# Altium PCB PCB.PcbDoc (part 3 of 3)
Units mil, origin at the board's own origin, x right, y up, seen from the top; angles counter-clockwise.
Board outline 3915 x 3280 mil, 4 copper layers (Top Layer, Top GND, Bottom GND, Bottom Layer), stack 61.581 mil thick; 92 components, 110 nets, 515 pads, 133 vias.
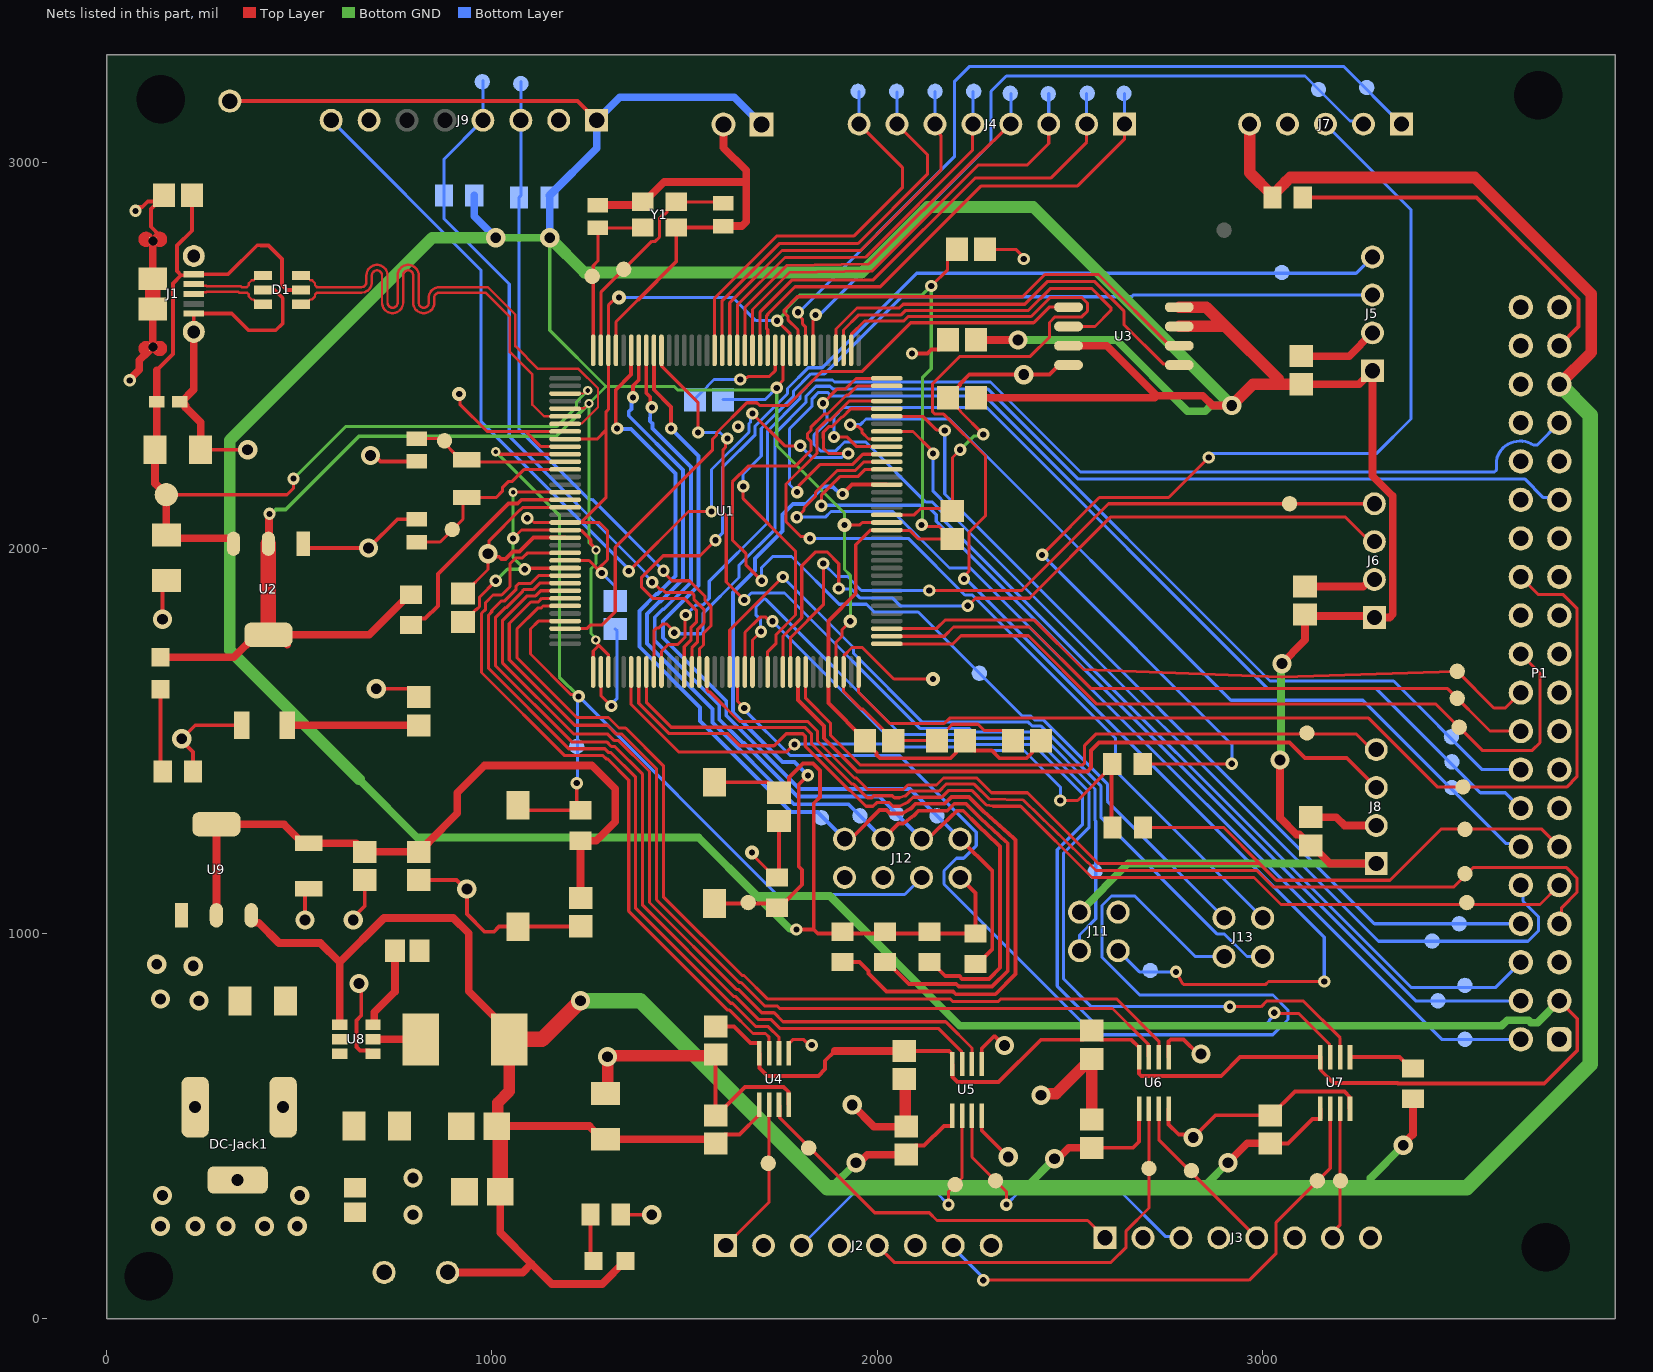
[diagram p4: the nets of this part, all layers, seen from the top]

## Via types
v1: diameter 32, hole 16, Top Layer to Bottom Layer, 77 vias
v2: diameter 50, hole 28, Top Layer to Bottom Layer, 44 vias
v3: diameter 36, hole 16, Top Layer to Bottom Layer, 6 vias
v4: diameter 24, hole 12, Top Layer to Bottom Layer, 6 vias

## Nets (pads, with @x,y where several pads share a name; then routed paths per layer and width w, separated by ;. In a path a pad name is that pad's centre, name@x,y a point inside that pad or via, vN(x,y) a via of type N, cw(c..) or ccw(c..) an arc to the next point about the centre after c; other vN are vias at no path point)
+3V3: C1.1 C7.1 C8.1 C9.1 C10.1 C11.1 C13.1 C14.1 C15.1 C17.1 C22.1 C26.1 C31.1 C32.1 C33.1 C34.1 C37.1 DS2.1 J5.1 J6.1 J8.1 J9.1 J10.1 J11.02 J12.02 P1.3 R2.2 R4.2 R5.2 R6.2 R7.2 R8.2 R9.2 R12.2 SW1.2 TP1.TP U1.11 U1.41 U1.52 U1.57 U1.62 U1.73 U1.75 U1.105 U1.125 U2.2 U2.4 U3.3 U3.7 U3.8 U4.8 U5.8 U6.8 U7.8 U9.2 U9.4 | length 27083.5
  Top Layer w6: U1.41@1190,2361.54 1227.01,2361.54 1228.12,2362.65 1239.35,2362.65 v4(1252.07,2375)
  Top Layer w8: C17.1@925,1808.55 927,1808.55 959.26,1840.81 960.6,1840.81 967.63,1847.84 967.63,1872.63 v1(1010,1915) ; v1(1055,2025) 1076.57,2046.57 U1.57@1190,2046.57 1190.73,2045.85 1231.8,2045.85 1256.52,2021.12 1256.52,2010.94 1270,1997.46 v4(1270,1995) ; v4(1055,2145) U1.52@1190,2145 ; v1(1085,1945) 1087.42,1947.42 1189.27,1947.42 U1.62@1190,1948.15 ; U1.73@1262.83,1678.46 1262.83,1732.83 1276.69,1746.69 1278.31,1746.69 ; v4(1269.37,1761.37) 1269.37,1757.04 1273.62,1752.78 1273.62,1751.38 1278.31,1746.69 ; U1.75@1302.2,1678.46 1301.99,1678.68 1301.99,1723.01 1278.31,1746.69 ; v1(1739.13,2415.62) 1739.13,2419.04 1754.96,2434.87 U1.11@1754.96,2513.11 ; U1.105@1892.76,1678.46 1892.76,1755.18 1908.31,1770.73 1908.31,1788.31 v3(1930,1810) ; v3(1915,2060) 1954.93,2060 1961.19,2066.26 U1.125@2024.65,2066.26
  Top Layer w10: TP1.TP@320,3160 1221.85,3160 J9.1@1271.85,3110 ; U2.2@420,2011.22 U2.2@421.46,2012.68 ; v1@421.46,2087.27 v1(422.92,2088.72) ; SW1.2@1577.68,1392.36 1715.64,1392.36 1743,1365 C9.1@1745,1365 1747,1365 1770.63,1388.63 1770.63,1404.47 1807.16,1441 1832.84,1441 1851,1422.84 1851,1353.82 1835,1337.82 1835,1010 ; C1.1@1580.46,758.08 1628.14,758.08 1670.87,715.35 1692.91,715.35 1693.82,714.45 U4.8@1693.82,688.86 1694.72,687.95 1694.72,650.28 1715,630 1847.2,630 1864.78,647.57 1864.78,669.31 1890,694.54 ; v1(1790,1010) 1835,1010 ; C34.1@2070,694.96 2185.96,694.96 2194.41,686.51 U5.8@2194.41,660.92 2195.32,660.01 2195.32,626.99 2207.88,614.42 2314.78,614.42 2424.14,723.78 2533.03,723.78 C14.1@2556.67,747.42 2580.3,723.78 2660.07,723.78 2679.41,704.45 U6.8@2679.41,678.86 2679.41,635.59 2685.27,629.73 2892.62,629.73 2941.74,678.86 U7.8@3150,678.86 3150.91,677.95 3150.91,644.93 3184.34,611.5 3349.74,611.5 3350.49,610.75 3730.73,610.75 3816.5,696.52 3816.5,778.5 P1.3@3770,825 ; J12.02@2215,1145 2255,1105 R7.2@2255,999.37 1845.63,999.37 1835,1010
  Top Layer w20: DS2.1@140,1716.34 330.32,1716.34 388.98,1775 U2.4@420,1775 ; U9.2@285,1046.89 U9.4@285,1283.11 460.2,1283.11 509.25,1234.06 C37.1@525,1234.06 647.39,1234.06 C7.1@670,1211.45 C31.1@810,1211.45 812,1211.45 835.63,1235.08 835.63,1237.08 910,1311.45 910,1365 980.86,1435.86 1259.14,1435.86 1320,1375 1320,1290 1270.63,1240.63 R12.2@1230,1240.63 C32.1@1230,1091.45 ; U2.2@421.46,2012.68 v1@421.46,2087.27 ; C15.1@469.06,1540 C8.1@810,1540 ; U2.4@469.06,1749.36 443.42,1775 681.34,1775 785.08,1878.74 R2.2@790,1878.74 ; 1890.02,694.98 C34.1@2070,694.96 ; C11.1@2256.45,2390 2720,2390 2725,2395 ; C10.1@2256.45,2540 v2(2365,2540) ; U3.3@2496.3,2525 2595,2525 2725,2395 ; v2(2920,2370) 2870,2370 2845,2395 2725,2395 ; v2(3045,1450) 3045,1299.55 3087.74,1256.81 3094.74,1256.81 3123,1228.55 C33.1@3125,1228.55 3127,1228.55 3173.98,1181.57 J8.1@3295,1181.57 ; v2(3050,1700) 3103.82,1755.74 3110,1761.92 C13.1@3110,1827.1 3113.69,1823.41 3286.31,1823.41 J6.1@3290,1819.72 3329.48,1819.72 3337.69,1827.93 3337.69,2134.75 3285,2187.44 J5.1@3285,2460 3250,2425 C26.1@3100,2425
  Top Layer w30: U3.7@2783.7,2575 2900,2575 2902.05,2577.05 ; U3.8@2783.7,2625 2854.1,2625 2902.05,2577.05 ; v2(2920,2370) 2975,2425 C26.1@3100,2425 ; 3040.47,2438.63 2902.05,2577.05
  Top Layer w40: U2.4@420,1775 U2.2@420,2011.22
  Bottom GND w8: v1(1010,1915) 1040,1945 v1(1085,1945) 1055,1975 v1(1055,2025) v4(1055,2145) ; v2(1150,2805) 1150,2565.07 1296.07,2419 ; v4(1269.37,1761.37) 1269.37,1765.7 1257,1778.06 1257,1946.6 1270,1959.6 v4(1270,1995) 1252.07,2012.93 v4(1252.07,2375) 1296.07,2419 ; v3(1930,1810) 1930,1929.18 1915,1944.18 v3(1915,2060) 1915,2090 1739.13,2265.87 v1(1739.13,2415.62) 1732.64,2415.62 1726.57,2409.55 1482.95,2409.55 1473.51,2419 1296.07,2419
  Bottom GND w10: v1(422.92,2088.72) 428.72,2088.72 440,2100 465,2100 655,2290 1167.07,2290 v4(1252.07,2375)
  Bottom GND w20: 655,1400 806.46,1248.54 1536.46,1248.54 1687.92,1097.08 ; v2(1010,2805) v2(1150,2805) ; v1(1790,1010) 1787.7,1012.3 1772.7,1012.3 1687.92,1097.08 ; v2(2365,2540) 2620,2540 2805,2355 2850.94,2355 2865.94,2370 v2(2920,2370) ; J11.02@2525,1055 2651.57,1181.57 J8.1@3295,1181.57 ; v2(3045,1450) 3047.5,1452.5 3047.5,1697.5 v2(3050,1700) ; P1.3@3770,825 3713.28,768.28 3696.71,768.28 3690.5,774.5 3634.5,774.5 3620,760 2214.39,760 1877.31,1097.08 1687.92,1097.08
  Bottom GND w30: 655,1400 320,1735 320,2280 845,2805 v2(1010,2805) ; v2(1150,2805) 1240,2715 1960,2715 2130,2885 2405,2885 v2(2920,2370)
  Bottom Layer w8: C22.1@1600,2385 1708.51,2385 v1(1739.13,2415.62)
  Bottom Layer w10: R8.2@1149.37,2914.92 R8.2@1150,2914.29
  Bottom Layer w20: R9.2@954.37,2915 954.37,2860.63 v2(1010,2805) ; R8.2@1149.37,2914.92 1271.85,3037.4 J9.1@1271.85,3110 1331.85,3170 1628.54,3170 J10.1@1699.21,3099.33 ; v2(1150,2805) R8.2@1150,2914.29
+5: C27.1 C28.1 C29.1 C30.1 C38.1 C39.1 C42.1 DS1.1 J7.5 L1.2 P1.35 R1.2 R3.1 TP3.TP U4.1 U5.1 U6.1 U7.1 U8.1 U9.3 | length 10994.1
  Top Layer w10: C28.1@1568.76,465.91 C28.1@1580.46,454.22 1604.09,477.85 1642.26,477.85 1693.82,529.41 U4.1@1693.82,555 ; C27.1@2075,425.61 2098.63,449.25 2121.41,449.25 2172.73,500.57 2193.5,500.57 2194.41,501.47 U5.1@2194.41,527.06 ; C29.1@2556.67,443.55 2663.55,443.55 2679.41,459.41 U6.1@2679.41,545 ; C30.1@3020,455 3065.59,455 3129.09,518.5 3149.09,518.5 3150,519.41 U7.1@3150,545
  Top Layer w20: U9.3@375.55,1046.89 375.55,1039.3 386.93,1027.92 394.52,1027.92 447.44,975 555,975 605,925 ; U8.1@605,762.4 605,925 ; TP3.TP@885,120 1080,120 1102.5,142.5 ; C39.1@1021.3,330 1021.3,223.7 1102.5,142.5 ; C38.1@1021.3,500 1253.01,500 1287.1,465.91 C42.1@1295,465.91 C28.1@1568.76,465.91 ; L1.2@1045,725 1045,745 940,850 940,1000 900,1040 720,1040 605,925 ; DS1.1@1346.34,150 1286.34,90 1155,90 1102.5,142.5 ; v2(1945,405) 1953.12,405 1973.73,425.61 C27.1@2075,425.61 ; v2(2460,415) 2468.12,415 2496.67,443.55 C29.1@2556.67,443.55 ; v2(2910,405) 2960,455 C30.1@3020,455 ; v2(3365,450) 3365,453.25 3390,478.25 R3.1@3390,570.63
  Top Layer w30: C38.1@1021.3,500 1015,506.3 1015,560 1045,590 L1.2@1045,725 ; J7.5@2966.3,3100 2966.3,2974.25 3025.63,2914.92 3057.75,2947.04 3057.75,2948.07 3071.22,2961.54 3550.12,2961.54 3852.5,2659.17 3852.5,2507.5 P1.35@3770,2425
  Top Layer w40: C39.1@1021.3,330 C38.1@1021.3,491.3 ; L1.2@1045,725 1130,725 v2(1230,825)
  Bottom GND w20: 1870,340 1880,340 v2(1945,405) ; 2380,340 2385,340 v2(2460,415) ; 2854.72,340 2854.72,349.72 v2(2910,405) ; 3280,340 3280,365 v2(3365,450)
  Bottom GND w40: v2(1230,825) 1385,825 1870,340 ; 1880,340 2380,340 ; 2385,340 2854.72,340 3280,340 3530,340 3850,660 3850,2345 P1.35@3770,2425
+12: C35.1 C36.1 C41.1 DC-Jack1.1 U8.2 U8.3
+VDDOUT: C2.1 C12.1 C18.1 C19.1 C20.1 C21.1 U1.10 U1.34 U1.45 U1.56 U1.61 U1.104 U1.124 | length 4485.7
  Top Layer w8: v1(1091.62,2077.2) 1098.11,2077.2 1109.05,2066.26 U1.56@1190,2066.26 1231.8,2066.26 1278.74,2066.26 1300,2045 1300,1970 v1@1275,1945 ; U1.61@1190,1967.83 1252.17,1967.83 v1@1275,1945 ; U1.45@1190.22,2282.57 1272.57,2282.57 1296.56,2306.56 ; 1231.8,2066.99 1296.56,2131.75 1296.56,2306.56 ; v1(1285,1935) v1@1275,1945 ; v3(1330,2650) 1322.49,2650 1302.2,2629.71 U1.34@1302.2,2513.11 1302.2,2359.61 1296.56,2353.97 1296.56,2306.56 ; v1(1740,2590) 1773.92,2556.08 1773.92,2513.84 U1.10@1774.65,2513.11 ; U1.124@2024.65,2046.57 2025.37,2045.85 2084.15,2045.85 2106.45,2023.55 C12.1@2193,2023.55 ; v1(2115,2060) 2119.19,2055.81 2160.74,2055.81 C12.1@2193,2023.55 ; v1(2140,2680) 2182.47,2722.47 2182.47,2750.37 C2.1@2207.1,2775 ; C12.1@2195,2023.55 C12.1@2193,2023.55
  Top Layer w10: U1.124@2024.65,2046.57 2024.3,2046.23 1981.81,2046.23 1943.98,2008.4 1943.98,1881.98 1873.07,1811.07 U1.104@1873.07,1678.46 1873.07,1597.48 1968.55,1502 C18.1@1968.55,1500 1968.55,1498 1997.81,1468.74 1997.81,1463.15 2006.6,1454.37 2189.85,1454.37 2204.26,1468.78 2204.26,1476.37 C19.1@2227.9,1500 2227.9,1498 2251.53,1474.37 2297.26,1474.37 2317.26,1454.37 2386.95,1454.37 2401.37,1468.78 2401.37,1476.37 C20.1@2425,1500
  Bottom GND w8: v1(1740,2590) 1763.56,2613.56 1763.56,2620.69 1799.72,2656.85 2116.85,2656.85 v1(2140,2680) 2140,2464.95 2117,2441.95 2117,2062 v1(2115,2060)
  Bottom Layer w8: v1(1285,1935) 1320,1900 C21.1@1320,1862.9 ; v3(1330,2650) 1625,2650 1685,2590 v1(1740,2590)
BCLK_TK: J7.2 pad.1@3145,3190 U1.7 | length 1903.7
  Top Layer w8: U1.7@1833.7,2513.11 1833.7,2592.21 1840,2598.51 v1(1840,2605)
  Bottom Layer w8: v1(1840,2605) 1844.59,2609.59 1854.59,2609.59 2295,3050 2295,3185 2335,3225 3110,3225 3226.81,3108.19 3253.39,3108.19 J7.2@3261.57,3100
CS: P1.29 U1.81 | length 3066.7
  Top Layer w8: U1.81@1420.32,1678.46 1420.32,1785.32 1427.87,1792.87 1433.53,1792.87 1444,1803.34 1453.09,1803.34 1473,1783.43 v1(1473,1780)
  Bottom Layer w8: v1(1473,1780) 1475.52,1777.48 1542.8,1777.48 1547.48,1782.17 1547.48,1829.85 1641.24,1923.61 1641.24,1955.28 1735,2049.04 1735,2297.88 1815.09,2377.97 1815.09,2394.14 1840.86,2419.91 1877.31,2419.91 1884.23,2413 2286.54,2413 2520.04,2179.5 3679.84,2179.5 3728.5,2130.84 3764.16,2130.84 P1.29@3770,2125
DB0: P1.2 pad.1@3525,725 U1.133 | length 2754.9
  Top Layer w8: v1(1791.28,2080) 1809.68,2098.4 1809.68,2104.31 1839.57,2134.2 1839.57,2144.63 1896.15,2201.2 1943.02,2201.2 1965.56,2223.74 U1.133@2024.65,2223.74
  Bottom Layer w8: v1(1791.28,2080) 1865,2080 1880,2095 2040.4,2095 2187.4,1948 2241.6,1948 3464.6,725 P1.2@3670,725
DB1: P1.4 pad.1@3455,825 U1.132 | length 2582.9
  Top Layer w8: v1(1855,2110) 1855.57,2110.57 1855.57,2138 1902.77,2185.2 1949.65,2185.2 1968.51,2204.06 U1.132@2024.65,2204.06
  Bottom Layer w8: v1(1855,2110) 1856,2111 2111.37,2111 2119.37,2103 2136.6,2103 2153,2086.6 2153,2069.37 3397.37,825 P1.4@3670,825
DB2: P1.6 pad.1@3525,865 U1.144 | length 2791.7
  Top Layer w8: v1(1859.09,2375.91) 1896.4,2413.22 1918.22,2413.22 1944.77,2439.77 1967.51,2439.77 1968.02,2440.28 U1.144@2024.65,2440.28
  Bottom Layer w8: v1(1859.09,2375.91) 1862.8,2372.2 1862.8,2351.11 1870,2343.91 1870,2327.43 1836.29,2293.71 1836.29,2268.86 1853.86,2251.29 1891.29,2251.29 1915,2275 1970,2275 2126,2119 2143.23,2119 2169,2093.23 2169,2076 3385,860 3605,860 P1.6@3670,925
DB3: P1.8 pad.1@3510,1025 U1.139 | length 2287.5
  Top Layer w8: U1.139@2024.65,2341.85 2118.15,2341.85 2153.2,2306.8 2173.2,2306.8 v1(2175,2305)
  Bottom Layer w8: v1(2175,2305) 2175,2140 3290,1025 P1.8@3670,1025
DB4: P1.10 pad.1@3440,980 U1.137 | length 2454.9
  Top Layer w8: U1.137@2024.65,2302.48 2092.52,2302.48 2145,2250 v1(2145,2245)
  Bottom Layer w8: v1(2145,2245) 2145,2147.37 2185,2107.37 2185,2095 3300.5,979.5 3688.85,979.5 3715.5,1006.15 3715.5,1043.85 3675.84,1083.5 3675.84,1119.16 P1.10@3670,1125
DB5: P1.12 pad.1@3491.23,1378.6 U1.136 | length 2319.8
  Top Layer w8: v1(1930,2320) 1934.59,2315.41 1950.94,2315.41 1960.8,2305.55 1960.8,2299.2 1977.2,2282.8 U1.136@2024.65,2282.8
  Bottom Layer w8: v1(1930,2320) 1955.65,2320 1970.65,2335 2187.43,2335 2917.43,1605 3260,1605 3632.24,1232.76 3662.24,1232.76 P1.12@3670,1225
DB6: P1.14 pad.1@3491.23,1445.1 U1.135 | length 2422.9
  Top Layer w8: v1(1887.83,2288.18) 1888.31,2288.66 1920.94,2288.66 1946.49,2263.11 U1.135@2024.65,2263.11
  Bottom Layer w8: v1(1887.83,2288.18) 1888,2288.36 1888,2340.43 1912.57,2365 2283.63,2365 3013.63,1635 3295,1635 3565,1365 3630,1365 P1.14@3670,1325
DB7: P1.16 pad.1@3490,1510 U1.134 | length 2806.9
  Top Layer w8: v1(1792,2145) 1796.59,2149.59 1796.59,2161.59 1852.2,2217.2 1936.4,2217.2 1962.62,2243.43 U1.134@2024.65,2243.43
  Bottom Layer w8: v1(1792,2145) 1772,2165 1772,2309.43 1831.09,2368.51 1831.09,2387.51 1847.49,2403.91 1870.69,2403.91 1879.6,2395 2279.09,2395 3019.09,1655 3340,1655 3570,1425 P1.16@3670,1425
DB8: P1.13
DB9: P1.15
DB10: P1.17
DB11: P1.19
DB12: P1.21
DB13: P1.23
DB14: P1.25
DB15: P1.27
DIN_TD: J7.3 R14.1 | length 2940.9
  Top Layer w8: v1(2427.7,1982.3) 2576.4,2131 2756,2131 v1(2860,2235) ; R14.1@2688.74,1440 v1(2920,1440)
  Bottom Layer w8: v1(2427.7,1982.3) 2920,1490 v1(2920,1440) ; v1(2860,2235) 2860,2240.31 2864.69,2245 3295,2245 3385,2335 3385,2878.15 J7.3@3163.15,3100
ERASE: pad.1@1665,1080 R13.2 SW1.1 U1.130 | length 1701.7
  Top Layer w10: SW1.1@1577.68,1077.4 1728.86,1077.4 R13.2@1740,1066.26 1744.92,1066.26 1805,1126.34 1805,1165.19 1796.19,1174 1796.19,1386.19 v1(1820,1410) ; v1(1910,2140) 1934.68,2164.68 U1.130@2024.65,2164.68
  Bottom Layer w10: v1(1820,1410) 1785,1445 1753.99,1445 1626,1572.99 1626,1884.33 1683,1941.33 1683,1973 1754,2044 1754,2086.56 1781.44,2114 1815.16,2114 1861.16,2160 1876.16,2160 1877.62,2158.54 1885.51,2158.54 1904.05,2140 v1(1910,2140)
FCS: P1.31
GND: C1.2 C2.2 C3.2 C4.2 C5.2 C6.2 C7.2 C8.2 C9.2 C10.2 C11.2 C12.2 C13.2 C14.2 C15.2 C16.2 C17.2 C18.2 C19.2 C20.2 C21.2 C22.2 C24.2 C25.2 C26.2 C27.2 C28.2 C29.2 C30.2 C31.2 C32.2 C33.2 C34.2 C35.2 C36.2 C37.2 C38.2 C39.2 C41.2 C42.2 D1.2 DC-Jack1.2 DC-Jack1.3 J1.5 J1.6 J1.7 J1.8 J1.9 J1.10 J1.11 J2.2 J2.4 J2.6 J2.8 J3.2 J3.4 J3.6 J3.8 J5.2 J6.2 J7.4 J8.2 J9.2 J9.7 J10.2 J11.04 J12.06 J12.08 P1.1 R10.2 R11.2 R13.1 RV1.1 SW2.1 TP2.TP U1.12 U1.33 U1.44 U1.46 U1.54 U1.58 U1.74 U1.106 U1.126 U2.1 U3.4 U4.4 U4.5 U5.4 U5.5 U6.4 U6.5 U7.4 U8.4 U9.1 Y1.2 Y1.4 | length 11809.6
  Top Layer w8: v3(915,2400) 916.8,2398.2 916.8,2373.2 987.52,2302.48 1087.52,2302.48 ; C17.2@925,1881.45 927,1881.45 990,1944.45 v2(990,1985) 992.84,1987.84 992.84,2018.8 1073.04,2099 1074.05,2099 1080.68,2105.63 U1.54@1190,2105.63 ; U1.46@1190,2263.11 1126.89,2263.11 1087.52,2302.48 ; U1.44@1190,2302.48 1087.52,2302.48 ; U1.74@1282.52,1678.46 1282.52,1617.48 v1(1310,1590) ; U1.33@1321.89,2513.11 1321.89,2586.89 1380,2645 ; Y1.4@1383.23,2890 Y1.4@1391.69,2898.46 Y1.4@1395.63,2898.46 ; v1(1644.46,2437.55) 1649.06,2442.15 1661.47,2442.15 1664.32,2445 1720,2445 1735.28,2460.28 U1.12@1735.28,2513.11 ; 1655.31,2926.31 1660,2931 ; v3(1675,1210) 1675,1205.08 1730.08,1150 R13.1@1745,1150 ; U4.5@1770.59,688.86 1772.5,690.76 1772.5,716.35 1780.43,724.29 1809.22,724.29 1823.51,710 v1(1830,710) ; U1.126@2024.65,2085.94 2096.35,2085.94 2113.4,2103 2188.45,2103 C12.2@2195,2096.45 2195,2235 v1(2215,2255) ; v3(2145,1660) 2043.11,1660 1961.41,1741.7 1934.61,1741.7 1913.17,1720.26 1913.17,1679.19 U1.106@1912.44,1678.46 1912.44,1628.33 1958.8,1581.97 1962.83,1581.97 2016.81,1527.98 2016.81,1524.63 C18.2@2041.45,1500 C19.2@2155,1500 2155,1502 2187.26,1534.26 2187.26,1535.6 2194.29,1542.63 2261.5,1542.63 2277.5,1526.63 2327.47,1526.63 2352.1,1502 C20.2@2352.1,1500 ; C11.2@2183.55,2390 2183.55,2388 2215.81,2355.74 2215.81,2354.19 v1(2275,2295) ; C2.2@2280,2775 2359.74,2775 2380,2754.74 v1(2380,2750)
  Top Layer w10: v1(75,2875) 85,2885 92.62,2885 106.72,2899.09 C25.2@132.64,2899.09 ; J1.8@120,2797.17 129.35,2806.51 J1.8@129.49,2806.51 ; v2(145,1815) 145,1905.91 C16.2@155,1915.91 ; 147.56,2801.1 137.72,2810.94 115,2833.66 115,2879.45 132.64,2897.09 C25.2@132.64,2899.09 ; C25.2@148.55,2915 C25.2@132.64,2899.09 ; RV1.1@189.84,2380 RV1.1@194.96,2380 ; 204.92,2364.92 RV1.1@204.92,2370.04 ; R11.2@224.37,1420 224.37,1470.73 195,1500.1 v2(195,1505) 230,1540 C15.2@350.94,1540 ; J1.7@226.3,2560.94 J1.5@226.3,2608.19 324.84,2608.19 368.03,2565 439.14,2565 457.07,2582.93 457.07,2648.37 435.44,2670 D1.2@405.79,2670 ; C24.2@244.09,2255 v2(366,2255) ; U2.1@510.55,2011.22 521.77,2000 v2(680,2000) 754.53,2074.53 C4.2@805,2074.53 ; v2(515,1035) 515,1105.94 C37.2@525,1115.94 ; v2(640,1035) 640,1040.82 670,1070.82 C7.2@670,1138.55 ; v2(655,870) 661,864 661,786.5 648.29,773.79 648.29,705.32 657.38,696.22 682.95,696.22 U8.4@691.57,687.6 ; v2(685,2240) 695.82,2240 710.82,2225 C3.2@805,2225 ; v2(700,1635) 787.9,1635 C8.2@810,1612.9 ; C31.2@810,1138.55 907.64,1138.55 931.19,1115 v2(935,1115) 935,1050 980.86,1004.14 1005.37,1004.14 1018.63,1017.4 SW2.1@1067.68,1017.4 1228.85,1017.4 C32.2@1230,1018.55 ; v2(990,1985) 997.65,1977.35 1019.02,1977.35 1025,1971.37 1035,1971.37 1054.63,1991 1072.01,1991 1107.9,2026.89 U1.58@1190,2026.89 ; C42.2@1295,584.09 C42.2@1310,599.09 ; R10.2@1334.37,270 v2(1415,270) ; 1380,2645 1478.31,2743.31 Y1.2@1478.31,2831.54 ; Y1.2@1474.37,2831.54 Y1.2@1478.31,2831.54 ; C1.2@1580.27,685 C1.2@1580.46,685.19 C28.2@1580.46,527.11 ; C28.2@1582.46,527.11 1656.84,601.5 1757.12,601.5 1769.68,588.93 1769.68,555.91 U4.4@1770.59,555 ; C6.2@1600,2835.47 1596.06,2831.54 Y1.2@1478.31,2831.54 ; R13.1@1745,1150 C9.2@1745,1292.1 ; v1(2090,2505) 2130,2505 2140,2515 2159.92,2515 2183.55,2538.63 C10.2@2183.55,2540 ; C11.2@2183.55,2390 2183.55,2392 2214.81,2423.26 2214.81,2426.02 2238.79,2450 v2(2380,2450) 2446.69,2450 2471.69,2475 U3.4@2496.3,2475 ; U5.4@2271.18,527.06 2271.18,488.82 v2(2340,420) ; U5.5@2271.18,660.92 2271.18,701.18 2302.35,732.35 2305.83,732.35 2329.18,709 v2(2330,709) ; J3.2@2689.45,210 J3.2@2698.9,200.55 ; U6.4@2756.18,545 2756.18,503.82 2782.35,477.65 2812.35,477.65 v2(2820,470) 2877.9,527.9 C30.2@3020,527.9 3022,527.9 3083.6,589.5 3212.47,589.5 3225.87,576.1 3225.87,545.91 U7.4@3226.77,545 ; U6.5@2756.18,678.86 2756.18,719.14 2762.04,725 2795,725 2833.09,686.91 v2(2840.16,686.91)
  Top Layer w19.68: v1(60,2435) 60,2437.65 85.3,2462.95 85.3,2486.87 J1.11@108.19,2509.76 ; J1.11@110.16,2511.73 J1.11@120,2521.57 J1.10@120,2620 ; J1.9@120,2698.74 J1.8@120,2797.17
  Top Layer w20: 204.92,2364.92 244.09,2325.76 C24.2@244.09,2255 ; RV1.1@204.92,2370.04 194.96,2380 226.3,2411.34 J1.7@226.3,2560.94 ; C5.2@1275,2890 Y1.4@1383.23,2890 ; Y1.4@1395.63,2898.46 1447.17,2950 1660,2950 ; C6.2@1600,2835.47 1648.28,2835.47 1660,2847.19 1660,2931 1660,2950 ; J10.2@1600.79,3099.33 1600.79,3039.21 1660,2980 1660,2950 ; v2(1935,555) 1991.49,498.51 C27.2@2075,498.51 ; C26.2@3100,2497.9 3224.47,2497.9 J5.2@3285,2558.43 ; C13.2@3110,1900 3261.2,1900 3279.35,1918.15 J6.2@3290,1918.15 ; C33.2@3125,1301.45 3191.18,1301.45 3212.63,1280 J8.2@3295,1280
  Top Layer w30: C42.2@1310,599.09 1300,609.09 v2(1300,680) 1302.59,682.59 1577.87,682.59 C1.2@1580.27,685 ; C34.2@2070,622.06 2072.5,619.56 2072.5,501.01 C27.2@2075,498.51 ; v2(2425,580) 2428.83,583.83 2463.97,583.83 2554.67,674.52 C14.2@2556.67,674.52 C29.2@2556.67,516.45
  Top Layer w40: J1.10@120,2620 J1.9@120,2698.74
  Bottom GND w8: v1(2215,2255) 2250.41,2290.41 2270.41,2290.41 v1(2275,2295)
  Bottom Layer w8: v1(1310,1590) 1310,1595.07 1325,1610.07 1325,1785 C21.2@1320,1790 ; C22.2@1527.1,2385 1527.1,2387 1559.37,2419.26 1559.37,2420.6 1576.32,2437.55 v1(1644.46,2437.55)
  other v1: 1639,2314.99
  other v2: 140,240 230,240 310,240 410,240 495,240 795,270 145,320 501.42,320 795,365 240,825 140,830 225,915 130,920
I2C_INT: J9.8 U1.140 | length 2669.5
  Top Layer w8: v1(1355,1940) 1510,2095 v1(1570,2095) ; v1(1675.9,2349.1) 1760,2265 v1(1800,2265) ; v1(1924.8,2245.2) 1873.34,2245.2 1860,2258.54 1860,2284.76 1859.76,2285 1859.76,2300.26 1875.41,2315.91 1883.94,2315.91 1908.03,2340 1910,2340 1931.54,2361.54 U1.140@2024.65,2361.54
  Bottom Layer w8: J9.8@582.87,3110 971.35,2721.52 971.35,2328.65 1355,1945 v1(1355,1940) ; v1(1570,2095) 1570,2203.59 1667,2300.59 1667,2323.22 1671.31,2327.53 1671.31,2344.5 v1(1675.9,2349.1) ; v1(1800,2265) 1829.71,2235.29 1908.39,2235.29 1918.3,2245.2 v1(1924.8,2245.2)
ISHAN: R14.2 R15.2 U1.78 | length 1678
  Top Layer w8: U1.78@1361.26,1678.46 1361.26,1593.94 1484.2,1471 1765,1471 1784,1490 v1(1785,1490) ; v1(2475,1345) 2519.92,1345 R14.2@2607.46,1432.54 ; R14.2@2610,1435.08 R14.2@2610,1440
  Top Layer w10: R14.2@2610,1435.08 2610,1430 2608.03,1431.97 2608.03,1277.6 R15.2@2610.63,1275
  Bottom Layer w8: v1(1785,1490) 1786,1491 2041.12,1491 2048.12,1484 2209.56,1484 2219.13,1474.43 2380.57,1474.43 2475,1380 v1(2475,1345)
JTAG_TCK: J12.01 pad.1@2155,1305 R7.1 U1.28 | length 2224.3
  Top Layer w10: U1.28@1420.32,2513.11 1420.32,2410.86 1465,2366.17 v1(1465,2310) ; J12.01@2215,1245 2298.54,1161.46 2298.54,959.25 2259.92,920.63 R7.1@2255,920.63
  Bottom Layer w10: v1(1465,2310) 1536.17,2238.83 1536.17,1902.89 1454.28,1821 1444,1810.72 1444,1767.16 1608,1603.16 1608,1565.53 1798.53,1375 2085,1375 2210,1250 2215,1250 J12.01@2215,1245
JTAG_TDI: J12.03 pad.1@2049,1311 R6.1 U1.29 | length 2570.1
  Top Layer w10: U1.29@1400.63,2513.11 1400.63,2402.26 1410.79,2392.1 1410.79,2369.21 v1(1415,2365) ; J12.03@2115,1245 2137.92,1254.54 2140.53,1254.54 2151.79,1265.8 2189.06,1300.24 2207.06,1318.24 2222.94,1318.24 2261.18,1280 2313.27,1230.74 2318.54,1225.47 2318.54,910.79 2289.76,882.01 2220.24,882.01 2213.25,889 2176.55,889 2139.92,925.63 R6.1@2135,925.63
  Bottom Layer w10: v1(1415,2365) 1410.79,2360.79 1410.79,2338.03 1410.05,2337.28 1410.05,2329 1416.24,2322.81 1416.24,2310.33 1516.17,2210.4 1516.17,1911.17 1446,1841 1443.16,1841 1422.57,1820.41 1422.57,1760.31 1590,1592.88 1590,1555.05 1651.43,1493.62 1653.95,1493.62 1792.57,1355 2005,1355 J12.03@2115,1245
JTAG_TDO: J12.05 pad.1@1955,1305 R5.1 U1.30 | length 2807
  Top Layer w10: v1(1366,2391) 1366,2421 1380.94,2435.94 U1.30@1380.94,2513.11 ; J12.05@2015,1245 2055.24,1285.24 2067.5,1285.24 2095.06,1306.24 2107.06,1318.24 2181.6,1318.24 2199.6,1336.24 2230.4,1336.24 2268.64,1298 2333.27,1239.02 2338.54,1233.75 2338.54,902.51 2298.04,862.01 2211.96,862.01 2204.97,869 2081.95,869 2025.32,925.63 R5.1@2020.4,925.63
  Bottom Layer w10: v1(1366,2391) 1361.79,2386.79 1361.79,2360.84 1355,2354.05 1355,2343.28 1496.17,2202.11 1496.17,1919.45 1437.72,1861 1434.88,1861 1402.57,1828.69 1402.57,1752.02 1572,1582.59 1572,1547.29 1784.29,1335 1925,1335 J12.05@2015,1245
JTAG_TMS: J12.07 pad.1@1855,1300 R4.1 U1.31 | length 3065.9
  Top Layer w10: v1(1325,2310) 1321.2,2313.8 1321.2,2410 1361.26,2450.06 U1.31@1361.26,2513.11 ; R4.1@1910,925.63 1953.54,925.63 1976.86,902.31 1976.86,895.79 2023.66,849 2196.68,849 2203.68,842.01 2306.32,842.01 2358.54,894.23 2358.54,1242.03 2353.27,1247.31 2276.09,1316 2237.86,1354.24 2192.14,1354.24 2174.14,1336.24 2099.6,1336.24 2087.6,1324.24 2064.98,1311 2033.01,1311 2023.77,1320.24 2006.23,1320.24 1940.53,1254.54 1924.54,1254.54 J12.07@1915,1245
  Bottom Layer w10: v1(1325,2310) 1326,2309 1361,2309 1476.17,2193.83 1476.17,1927.74 1429.43,1881 1426.59,1881 1382.57,1836.98 1382.57,1743.74 1540,1586.31 1540,1551.01 1776.01,1315 1845,1315 J12.07@1915,1245
L_ALM: U1.94 U7.6 | length 2619.9
  Top Layer w8: U1.94@1676.22,1678.46 1676.22,1761.22 v1(1698.15,1783.15) ; v1(2915,810) 2996.23,810 3011.23,825 3105,825 3201.18,728.82 U7.6@3201.18,678.86
  Bottom Layer w8: v1(1698.15,1783.15) 1696.81,1784.49 1696.81,1815.15 1685,1826.96 1685,1847.43 1704.77,1867.2 1710.17,1867.2 2061.37,1516 2231.3,1516 2240.87,1506.43 2410.8,1506.43 2549,1368.23 2549,1274 2483.08,1208.08 2483.08,881.92 2555,810 v1(2915,810)
L_DR: U1.65 U5.6 | length 2177.6
  Top Layer w8: U1.65@1190,1889.09 1126.68,1889.09 1113.58,1876 1091.46,1876 1027,1811.54 1027,1702.54 1211.82,1517.73 1299.69,1517.73 1316.42,1501 1328.09,1501 1409,1420.09 1409,1080.09 1634.37,854.72 1639.26,854.72 1699.98,794 1732.27,794 1755.54,770.73 2177.28,770.73 2245.59,702.42 U5.6@2245.59,660.92
L_MF: U1.67 U6.6 | length 2548.3
  Top Layer w8: U1.67@1190,1849.72 1189.78,1849.5 1132.34,1849.5 1126.84,1844 1119,1844 1065.23,1790.23 1065.23,1715.23 1220.23,1560.23 1302.45,1560.23 1329.67,1533 1347,1533 1445,1435 1445,1095 1649.28,890.72 1654.17,890.72 1714.89,830 2188.81,830 2195.8,823.01 2314.19,823.01 2321.19,830 2620.94,830 2730.59,720.35 U6.6@2730.59,678.86
L_PU: U1.63 U4.6 | length 1777.8
  Top Layer w8: U1.63@1190,1928.46 1120.79,1928.46 1100.33,1908 1069.67,1908 1063,1901.33 1063,1893.05 1031.95,1862 1023.67,1862 999.63,1837.96 999.63,1834.59 991,1825.95 991,1687.63 1199.46,1479.17 1292.99,1479.17 1303.16,1469 1309.18,1469 1373,1405.18 1373,1065.18 1619.46,818.72 1624.35,818.72 1685.07,758 1717.35,758 1745,730.35 U4.6@1745,688.86
LED_A: P1.37 R1.1 | length 965.7
  Top Layer w10: R1.1@3104.37,2910 3555,2910 3819.5,2645.5 3819.5,2574.5 P1.37@3770,2525
LM_ALM: J3.7 pad.1@3202.01,358.15 U7.3 | length 343.1
  Top Layer w8: J3.7@3181.57,210 3181.57,223.9 3201.18,243.51 U7.3@3201.18,545
LM_DR: J3.3 pad.1@2307.01,358.15 U5.3 | length 784.8
  Top Layer w8: U5.3@2245.59,527.06 2245.59,419.41 2335,330 v1(2335,296)
  Bottom Layer w8: v1(2335,296) 2369,330 2631.23,330 2748.19,213.04 2784.83,213.04 J3.3@2787.87,210
LM_MF: J3.5 pad.1@2815.16,384.37 U6.3 | length 440.3
  Top Layer w8: U6.3@2730.59,545 2730.59,464.13 J3.5@2984.72,210
LM_PU: J3.1 pad.1@1822.01,443.15 U4.3 | length 1007.4
  Top Layer w8: U4.3@1745,555 1746.91,553.09 1746.91,521.48 1993.39,275 2135,275 2155,255 2546.02,255 J3.1@2591.02,210
LRCLK_TF: J7.1 pad.1@3270,3195 U1.8 | length 2113.4
  Top Layer w8: v1(1794.13,2611.66) 1794.13,2605.17 1806.28,2593.02 1806.28,2581.02 1814.02,2573.28 U1.8@1814.02,2513.11
  Bottom Layer w8: v1(1794.13,2611.66) 1796.66,2611.66 2200,3015 2200,3210 2240,3250 3210,3250 J7.1@3360,3100
METAL_SEN1: J4.1 pad.1@2640,3180 U1.13 | length 1329.9
  Top Layer w8: U1.13@1715.59,2513.11 1715.81,2513.33 1715.81,2566.56 1712,2570.37 1712,2601.6 1715.81,2605.41 1715.81,2607.36 1786.54,2678.09 2008.09,2678.09 2270,2940 2520,2940 2641.85,3061.85 J4.1@2641.85,3100
  Bottom Layer w8: J4.1@2641.85,3100 pad.1@2641.85,3180
METAL_SEN2: J4.2 pad.1@2545,3180 U1.14 | length 1256.4
  Top Layer w8: U1.14@1695.91,2513.11 1695.91,2612.91 1779.09,2696.09 1989.65,2696.09 2253.56,2960 2450,2960 2543.43,3053.43 J4.2@2543.43,3100
  Bottom Layer w8: J4.2@2543.43,3100 pad.1@2543.43,3180
METAL_SEN3: J4.3 pad.1@2443.7,3178.7 U1.15 | length 1181.6
  Top Layer w8: U1.15@1676.22,2513.11 1676.22,2618.94 1769.67,2712.39 1772.24,2714.96 1986.99,2718.88 2261.55,2993.45 2388.45,2993.45 2445,3050 J4.3@2445,3100
  Bottom Layer w8: J4.3@2445,3100 pad.1@2445,3180
METAL_SEN4: J4.4 pad.1@2345,3180 U1.16 | length 1075.3
  Top Layer w8: U1.16@1656.54,2513.11 1656.54,2624.71 1764.78,2732.96 1977.68,2736.89 1980.25,2739.44 2254.1,3011.45 J4.4@2346.57,3100
  Bottom Layer w8: J4.4@2346.57,3100 pad.1@2346.57,3180
METAL_SEN5: J4.5 pad.1@2250,3185 U1.17 | length 1047
  Top Layer w8: U1.17@1636.85,2513.11 1636.85,2630.48 1760.37,2754 1929.33,2754 1969.75,2754.75 2246.68,3031.68 2246.68,3098.53 J4.5@2248.15,3100
  Bottom Layer w8: J4.5@2248.15,3100 pad.1@2248.15,3185
METAL_SEN6: J4.6 pad.1@2150,3185 U1.18 | length 1024.7
  Top Layer w8: U1.18@1617.17,2513.11 1617.17,2636.25 1752.91,2772 1929.17,2772 1957.99,2772.53 2165,2979.54 2165,3070.82 2149.72,3086.1 J4.6@2149.72,3100
  Bottom Layer w8: J4.6@2149.72,3100 pad.1@2149.72,3185
METAL_SEN7: J4.7 pad.1@2050,3185 U1.19 | length 1043.4
  Top Layer w8: U1.19@1597.48,2513.11 1597.48,2642.02 1745.46,2790 1929,2790 1950.4,2790.4 2130,2970 2130,3021.3 J4.7@2051.3,3100
  Bottom Layer w8: J4.7@2051.3,3100 pad.1@2051.3,3183.7
METAL_SEN8: J4.8 pad.1@1950,3185 U1.20 | length 1047.2
  Top Layer w8: U1.20@1577.8,2513.11 1577.8,2647.8 1740,2810 1940,2810 2065,2935 2065,2987.87 J4.8@1952.87,3100
  Bottom Layer w8: J4.8@1945.89,3106.99 J4.8@1952.87,3100 pad.1@1952.87,3185
NC: P1.5
NC-CRT: P1.24
NC-INT: P1.39
NC-SCL: P1.40
NC-SDA: P1.38
NetC40_1: C40.1 L1.1 U8.5 | length 123.4
  Top Layer w20: U8.5@691.57,725 L1.1@815,725
NetC40_2: C40.2 U8.6 | length 216.1
  Top Layer w10: U8.6@691.57,762.4 U8.6@695,765.83
  Top Layer w20: U8.6@695,765.83 695,795 748.28,848.28 C40.2@748.28,955
NetDS1_2: DS1.2 R10.1 | length 112
  Top Layer w10: DS1.2@1255.63,158.03 R10.1@1255.63,270
NetDS2_2: DS2.2 R11.1 | length 216
  Top Layer w10: DS2.2@140,1633.66 140,1425.63 R11.1@145.63,1420
NetR2_1: R2.1 U1.53 | length 583.4
  Top Layer w10: R2.1@790,1800 806.69,1816.69 826.69,1816.69 860,1850 860,1933.01 1042.99,2116 1067.01,2116 1076.33,2125.31 U1.53@1190,2125.31
NetR3_2: R3.2 U7.5 | length 175.4
  Top Layer w10: U7.5@3226.77,678.86 3355.59,678.86 3385.08,649.37 R3.2@3390,649.37
NRST: J12.04 pad.1@1220,1485 R12.1 SW2.2 U1.47 U1.69 | length 2831.4
  Top Layer w8: v4(1010,2250) 1014.33,2250 1020.9,2243.43 U1.47@1190,2243.43 ; U1.69@1190,1810.35 1120.35,1810.35 1100,1790 1100,1725 1205.41,1619.59 1220.41,1619.59 v1(1225,1615)
  Top Layer w10: SW2.2@1080.67,1319.37 R12.1@1230,1319.37 ; R12.1@1220,1329.37 v1(1220,1390)
  Top Layer w12: R12.1@1220,1329.37 R12.1@1230,1319.37
  Top Layer w20: SW2.2@1067.68,1332.36 SW2.2@1080.67,1319.37
  Bottom GND w8: v4(1010,2250) 1175,2085 1175,1665 v1(1225,1615)
  Bottom Layer w8: v1(1220,1390) 1222.5,1392.5 1222.5,1612.5 v1(1225,1615) 1738.92,1101.08 2071.08,1101.08 J12.04@2115,1145
PWM_SONAR1: J5.4 pad.1@3050,2715 U1.85 | length 2735
  Top Layer w8: U1.85@1499.06,1678.46 1499.06,1743.83 1517,1761.77 1517,1794.62 1531.12,1808.75 1531.12,1837.6 1500.17,1868.55 1418.64,1868.55 1387.69,1899.5 1387.69,1923.14 1444.55,1980 1540,1980 v1(1580,2020) ; J5.4@3278.31,2755.28 J5.4@3285,2755.28
  Bottom Layer w8: v1(1580,2020) 1598,2038 1598,2208.97 1683,2293.97 1683,2316.59 1767.09,2400.68 1767.09,2414.02 1820.98,2467.91 1856.95,2467.91 2102.03,2713 3242.72,2713 J5.4@3285,2755.28
PWM_SONAR2: J6.4 pad.1@3070,2115 U1.99 | length 1869.1
  Top Layer w8: U1.99@1774.65,1678.46 1774.65,1767.42 1860,1852.77 v1(1860,1960) ; v1(2135,1890) 2375,1890 2600,2115 J6.4@3290,2115
  Bottom Layer w8: v1(1860,1960) 1894,1926 1922.6,1926 1958.6,1890 v1(2135,1890)
PWM_SONAR3: J8.4 pad.1@3115,1520 U1.101 | length 1716.1
  Top Layer w8: U1.101@1814.02,1678.46 1814.02,1609.78 1879,1544.8 1879,1513.31 1954.95,1437.37 2533.31,1437.37 2538,1442.05 2538,1488 2567,1517 3243.81,1517 3283.96,1476.85 J8.4@3295,1476.85
R_ALM: U1.93 U7.7 | length 2543.8
  Top Layer w8: U1.93@1656.54,1678.46 1656.54,1781.13 1696,1820.6 1710.68,1820.6 1721.51,1809.77 v1(1728,1809.77) ; v1(3030,794) 3032,792 3094.06,792 3173.69,712.37 3173.69,680.76 U7.7@3175.59,678.86
  Bottom Layer w8: v1(1728,1809.77) 2030.77,1507 2047.75,1507 2054.75,1500 2219.43,1500 2229.01,1490.43 2404.17,1490.43 2533,1361.6 2533,1283 2467.08,1217.08 2467.08,863.19 2565.27,765 3009.74,765 3017.4,772.66 3017.4,774.91 3030,787.51 v1(3030,794)
R_DR: U1.64 U5.7 | length 2200.7
  Top Layer w8: U1.64@1190,1908.78 1123.73,1908.78 1106.95,1892 1082,1892 1079,1889 1079,1886.42 1038.58,1846 1036,1846 1009,1819 1009,1695.09 1206.92,1497.17 1297.62,1497.17 1309.79,1485 1318.63,1485 1391,1412.63 1391,1072.63 1626.91,836.72 1631.8,836.72 1692.52,776 1724.81,776 1748.08,752.73 2159.8,752.73 2218.09,694.43 2218.09,662.82 U5.7@2220,660.92
R_MF: U1.66 U6.7 | length 2570.9
  Top Layer w8: U1.66@1190,1869.41 1129.62,1869.41 1120.21,1860 1100.91,1860 1045,1804.09 1045,1710 1215,1540 1300.05,1540 1323.05,1517 1337.54,1517 1427,1427.54 1427,1087.54 1641.83,872.72 1646.72,872.72 1707.43,812 1739.72,812 1746.72,805 2610.47,805 2691.11,724.35 2703.09,712.37 2703.09,680.76 U6.7@2705,678.86
R_PU: U1.60 U4.7 | length 1859.9
  Top Layer w8: 1047,1931.95 1047,1899.67 1025.33,1878 1003,1878 983.63,1858.63 983.63,1841.22 973,1830.58 973,1677 1188.83,1461.17 1288.36,1461.17 1296.54,1453 1299.72,1453 1355,1397.72 1355,1057.72 1612,800.72 1616.89,800.72 1677.61,740 1709.76,740 1719.41,730.35 U4.7@1719.41,688.86 ; 1046.98,1931.98 1046.98,1959.3 1061.67,1974 1079.05,1974 1092.57,1987.52 U1.60@1190,1987.52
RD: P1.11 pad.1@3525,1270 R15.1 U1.88 | length 2919.3
  Top Layer w8: U1.88@1558.11,1678.46 1558.33,1678.24 1558.33,1630.82 1563.02,1626.14 1566.54,1626.14 1642.68,1550 1819.85,1550 1845,1524.85 1845,1499.23 1938.52,1405.71 1940.86,1403.37 1945.43,1403.37 1975.56,1373.24 2067.3,1373.24 2079.3,1385.24 2153.85,1385.24 2171.85,1403.24 2258.15,1403.24 2296.39,1365 2390,1365 2392.34,1362.66 2574,1181 2992.51,1181 ; R15.1@2689.37,1275 2898.51,1275 2992.51,1181 ; P1.11@3770,1225 3724.5,1270.5 3463.09,1270.5 3330.48,1137.89 3035.62,1137.89 2992.51,1181
RESET: P1.33 U1.82 | length 3057.6
  Top Layer w8: U1.82@1440,1678.46 1440,1731.8 1457.89,1749.69 1482.29,1749.69 1501,1768.4 1501,1823.88 v1(1503.12,1826)
  Bottom Layer w8: v1(1503.12,1826) 1528.95,1851.82 1546.82,1851.82 1564.06,1869.06 1564.06,1914.06 1715,2065 1715,2303.34 1799.09,2387.43 1799.09,2400.76 1834.24,2435.91 1883.94,2435.91 1888.85,2431 2294,2431 2527.5,2197.5 3600,2197.5 3601.95,2197.5 3606.64,2202.19 3606.64,2218.77 cw(c3664.06,2218.77) 3630,2265 cw(c3667.97,2213.47) 3696.68,2270.68 3704.17,2266.92 3711.92,2266.92 3713.41,2268.41 P1.33@3770,2325
RM_ALM: J2.7 pad.1@3142.01,358.15 U7.2 | length 1344.5
  Top Layer w8: v1(2275,100) 2965,100 3035,170 3035,250 3175.59,390.59 U7.2@3175.59,545
  Bottom Layer w8: J2.7@2197.13,190 2197.13,183.94 2275,106.06 v1(2275,100)
RM_DR: J2.3 pad.1@2202.01,348.15 U5.2 | length 699.2
  Top Layer w8: v1(2185,296) 2185,330 2220,365 U5.2@2220,527.06
  Bottom Layer w8: J2.3@1803.43,190 1943.43,330 2151,330 v1(2185,296)
RM_MF: J2.5 pad.1@2705,390 U6.2 | length 1063.8
  Top Layer w8: J2.5@2000.28,190 2043.96,146.31 2606.51,146.31 2645.76,185.57 2645.76,228.09 2705,287.33 U6.2@2705,545
RM_PU: J2.1 pad.1@1717.01,403.15 U4.2 | length 411.7
  Top Layer w8: J2.1@1606.57,190 1719.41,302.83 U4.2@1719.41,555
RS: P1.7 pad.1@3525,1155 U1.80 | length 2906.2
  Top Layer w8: U1.80@1400.63,1678.46 1400.63,1599.83 1404.34,1596.11 1465.46,1535 1635.05,1535 1636.05,1534 1813.23,1534 1829,1518.23 1829,1492.6 1934.24,1387.37 1938.8,1387.37 1974.17,1352 1985.67,1352 1990.9,1357.24 2039.1,1357.24 2044.33,1352 2051.14,1352 2057.76,1352 2073.93,1357.24 2085.93,1369.24 2160.48,1369.24 2178.48,1387.24 2251.52,1387.24 2289.76,1349 2378.63,1346 2567.77,1163 2985.05,1163 3028.16,1119.89 3495.15,1119.89 3545.76,1170.5 3788.85,1170.5 3815.5,1143.85 3815.5,1106.15 3775.84,1066.5 3775.84,1030.84 P1.7@3770,1025
RX: J11.01 pad.1@2565,1160 U1.27 | length 2347.5
  Top Layer w8: U1.27@1440,2513.11 1440.73,2512.38 1440.73,2471.31 1535,2377.04 v1(1535,2300) ; v1(1610.9,2284.1) 1606.31,2279.5 1606.31,2261.31 1600,2255 1600,2091.75 1608,2083.75 1608,1912 v1(1655,1865)
  Bottom Layer w8: v1(1535,2300) 1591.74,2300 1607.64,2284.1 v1(1610.9,2284.1) ; v1(1655,1865) 1673.2,1883.2 1759.17,1883.2 2110.37,1532 2237.93,1532 2247.5,1522.43 2417.43,1522.43 2565,1374.85 2565,1293.09 2566.92,1291.17 2566.92,1037.64 2525,995.71 J11.01@2525,955
SCL: J9.3 pad.1@1075,3205 R8.1 U1.87 | length 1783.3
  Top Layer w8: v1(1445.17,1941.02) 1445.17,1937.35 1467.52,1915 1512.88,1915 1553,1874.88 1553,1863.8 1568,1848.8 1568,1797.54 1549,1778.54 1549,1748.52 1538.43,1737.95 U1.87@1538.43,1678.46
  Bottom Layer w8: pad.1@1075,3210 J9.3@1075,3110 1075,2914.37 R8.1@1070.63,2910 1070.63,2306.8 1251.22,2126.2 1259.98,2126.2 v1(1445.17,1941.02)
SD_CLK: P1.32
SD_CS: P1.36
SD_DIN: P1.34
SD_DO: P1.30
SDA: J9.4 pad.1@975,3210 R9.1 U1.86 | length 1913.4
  Top Layer w8: v1(1415.69,1911.1) 1418.24,1911.1 1436.77,1892.58 1442.42,1892.58 1450,1885 1517.43,1885 1524,1878.43 1524,1867.35 1550,1841.35 1550,1804.99 1533,1787.99 1533,1755.15 1518.74,1740.89 U1.86@1518.74,1678.46
  Bottom Layer w8: pad.1@976.57,3213.43 J9.4@976.57,3110 875.63,3009.06 R9.1@875.63,2915 875.63,2854.37 1045,2685 1045,2290 1397.17,1937.83 1397.17,1932.17 1415.69,1913.65 v1(1415.69,1911.1)
SPI_CLK1: P1.18 pad.1@3505,1610 U1.110 | length 1767.1
  Top Layer w8: U1.110@2024.65,1770.98 2174.02,1770.98 2198.03,1795 2395,1795 2555,1635 3480,1635 3590,1525 P1.18@3670,1525
SPI_CLK2: U1.9 U3.6 | length 1259.9
  Top Layer w8: U1.9@1794.33,2513.11 1794.33,2566.3 1768,2592.63 1768,2601.6 1758.31,2611.28 1758.31,2617.91 1792.4,2652 2377,2652 2435,2710 2574.09,2710 2759.09,2525 U3.6@2783.7,2525
SPI_CLK3: J13.02 pad.1@2265,1675 U1.143 | length 2496.4
  Top Layer w8: v1(1700,1915) 1658.8,1956.2 1658.8,1986.2 1624,2021 1624,2171.6 1664.9,2212.5 1787.1,2212.5 1828,2253.4 1828,2271.5 1827.76,2271.75 1827.76,2276.84 1818.5,2286.09 1818.5,2295.73 1827.76,2304.98 1827.76,2313.51 1862.16,2347.91 1870.69,2347.91 1920,2397.22 1924.85,2397.22 1948.22,2420.59 U1.143@2024.65,2420.59
  Bottom Layer w8: v1(1700,1915) 1700,1949.6 1728.4,1978 1777.4,1978 1901.4,1854 1971.97,1854 1991.97,1834 2106,1834 2376,1564 2398.48,1564 2408.05,1554.43 2430.68,1554.43 2597,1388.11 2597,1343 J13.02@2900,1040
SPI_CS1: P1.20 pad.1@3505,1680 U1.111 | length 1764.2
  Top Layer w8: U1.111@2024.65,1790.67 2153.31,1790.67 2175.65,1813 2407,1813 2532.67,1687.33 2535,1685 3048.63,1665.03 ccw(c3050,1700) 3051.17,1665.02 3498.37,1680 pad.1@3505,1680 3600,1585 3630,1585 P1.20@3670,1625
SPI_CS2: U1.70 U3.1 | length 1775.5
  Top Layer w8: U1.70@1190,1790.67 1246.07,1790.67 1255.4,1800 1285,1800 1320,1835 1320,2001.62 1572,2253.62 1572,2281.6 1582.9,2292.5 1582.9,2298.5 1661.5,2377.1 1687.5,2377.1 1694.91,2369.68 1767.26,2369.68 1855.35,2457.77 1960.06,2457.77 2086.92,2584.63 2405.8,2584.63 2446.17,2625 U3.1@2496.3,2625
SPI_CS3: J13.04 U1.141 | length 2196
  Top Layer w8: v1(1825,2025) 1820.41,2029.59 1802.09,2029.59 1763.28,2068.4 1763.28,2166.05 1844,2246.77 1844,2278.13 1843.76,2278.37 1843.76,2306.89 1868.78,2331.91 1877.31,2331.91 1926.62,2381.22 U1.141@2024.65,2381.22
  Bottom Layer w8: v1(1825,2025) 2080.4,2025 2227.4,1878 2246.6,1878 2618.34,1506.26 2618.34,1421.66 J13.04@3000,1040
SPI_MISO1: P1.26 pad.1@3520,1380 U1.108 | length 2658.2
  Top Layer w8: U1.108@1951.81,1678.46 1951.81,1625.13 2032.3,1544.63 2173.66,1544.63 2187.66,1558.63 3275,1558.63 3454.13,1379.5 3788.85,1379.5 3815.5,1406.15 3815.5,1843.85 3780.18,1879.16 3715.84,1879.16 P1.26@3670,1925
SPI_MISO2: U1.3 U3.2 | length 946.6
  Top Layer w8: U1.3@1912.44,2513.11 1912.44,2565.62 1951.82,2605 2062.03,2605 2073.66,2616.63 2392.55,2616.63 2449.91,2674 2556,2674 2606.27,2623.73 2606.27,2616.27 2565,2575 U3.2@2496.3,2575
SPI_MISO3: J13.01 U1.92 | length 3181.4
  Top Layer w8: U1.92@1636.85,1678.46 1636.85,1603.15 v1(1655,1585)
  Bottom Layer w8: v1(1655,1585) 1655,1580.4 1773.4,1462 2057.29,1462 2256.92,1262.36 2256.92,1227.64 2224.29,1195 2205.71,1195 2173.08,1162.36 2173.08,1127.64 2563.71,737 3026.6,737 3066,776.4 3066,800.77 3026.77,840 2680.71,840 2583.08,937.64 2583.08,1072.36 2607.64,1096.92 2668.34,1096.92 2825.26,940 J13.01@2900,940
SPI_MOSI: P1.22 pad.1@3510,1535 U1.109 | length 2086.2
  Top Layer w8: U1.109@2024.65,1751.3 2196.3,1751.3 2217.27,1772.27 2392.27,1772.27 2569.54,1595 3450,1595 3570,1475 3700,1475 3720,1495 3720,1675 P1.22@3670,1725
SPI_MOSI2: U1.4 U3.5 | length 1108.2
  Top Layer w8: U1.4@1892.76,2513.11 1892.76,2568.56 1947.2,2623 2057.4,2623 2067.04,2632.63 2383.09,2632.63 2442.46,2692 2563.46,2692 2640.01,2615.44 2640.01,2579.99 2742.1,2477.9 2780.8,2477.9 U3.5@2783.7,2475
SPI_MOSI3: J13.03 U1.91 | length 2013.3
  Top Layer w8: U1.91@1617.17,1678.46 1617.17,1787.17 v1(1755,1925)
  Bottom Layer w8: v1(1755,1925) 1938.3,1741.7 1938.3,1726.7 2117,1548 2391.85,1548 2401.43,1538.43 2424.05,1538.43 2581,1381.48 2581,1299.71 2882.64,998.08 2901.21,998.08 2959.29,940 J13.03@3000,940
T_IRQ: P1.28
TRG_SONAR1: J5.3 U1.96 | length 2474.8
  Top Layer w8: v1(1652,2160) 1652,2128 1788,1992 1788,1826.03 1737.6,1775.63 1737.6,1753 1715.59,1730.99 U1.96@1715.59,1678.46
  Bottom Layer w8: v1(1652,2160) 1652,2192 1699,2239 1699,2309.97 1783.09,2394.05 1783.09,2407.39 1827.61,2451.91 1863.57,2451.91 2063.66,2652 2660.04,2652 2664.89,2656.85 J5.3@3285,2656.85
TRG_SONAR2: J6.3 U1.98 | length 2014.3
  Top Layer w8: U1.98@1754.96,1678.46 1754.96,1770.36 1804,1819.4 1804,1954 1840,1990 1869.6,1990 1900,1959.6 v1(1900,1895) ; v1(2235,1850) 2254.69,1869.69 2395,1869.69 2395,1870 2605,2080 3215,2080 3278.43,2016.57 J6.3@3290,2016.57
  Bottom Layer w8: v1(1900,1895) 1901.03,1893.97 1932,1893.97 1955.97,1870 2040,1870 2060,1850 v1(2235,1850)
TRG_SONAR3: J8.3 U1.100 | length 1774.3
  Top Layer w10: U1.100@1794.33,1678.46 1794.33,1605.43 1862,1537.76 1862,1506.27 1947.91,1420.37 2545.27,1420.37 2555,1430.09 2555,1475 2575,1495 3070,1495 3110,1455 3218.43,1455 J8.3@3295,1378.43
TX: J11.03 pad.1@2708.39,903.56 U1.2 | length 3837.6
  Top Layer w8: U1.2@1932.13,2513.11 1932.86,2513.84 1932.86,2554.91 1966.95,2589 2068.66,2589 2080.29,2600.63 2399.17,2600.63 2448.33,2649.8 2531.18,2649.8 2545.7,2635.27 2545.7,2614.73 2530.77,2599.8 2461.42,2599.8 2446.9,2585.27 2446.9,2546.9 2397.32,2497.32 2214.63,2497.32 2142.92,2425.6 2142.92,2354.4 2149.95,2347.37 2172.23,2347.37 2281,2238.6 2281,2083.58 2237.63,2040.22 2237.63,1939.13 2225,1926.49 v1(2225,1920) ; v1(2775,900) 2791.59,870.87 2794.69,867.76 3007.53,867.76 3008.33,867.93 3015.4,875 v1(3160,875)
  Bottom Layer w8: v1(2225,1920) 2230,1920 3160,990 v1(3160,875) ; J11.03@2625,955 2680,900 v1(2775,900)
USB_N: D1.6 U1.43 | length 1458.6
  Top Layer w6.23: D1.6@504.21,2707.4 516.02,2707.4 528.5,2694.93 533.27,2694.93 540.95,2687.24 540.95,2681.87 545.7,2677.11 651.03,2677.11 661.26,2677.11 ccw(c661.26,2690.23) 674.38,2690.23 674.38,2707.42 cw(c701.72,2707.42) 729.07,2707.42 729.07,2636.7 ccw(c742.18,2636.7) 755.3,2636.7 755.3,2707.42 cw(c782.64,2707.42) 809.99,2707.42 809.99,2636.7 ccw(c823.1,2636.7) 836.22,2636.7 836.22,2649.77 cw(c863.56,2649.77) 863.56,2677.11 896.1,2677.11 989.14,2677.11 1060.91,2605.34 1060.91,2524.09 1120,2465 1224.78,2465 1275.18,2414.6 1275.18,2365.43 1232.99,2323.23 U1.43@1190,2323.23 ; U1.43@1184.11,2322.17 U1.43@1190,2322.17
USB_P: D1.4 U1.42 | length 1291.5
  Top Layer w6.23: D1.4@504.21,2632.6 516.02,2632.6 528.5,2645.07 533.27,2645.07 540.95,2652.76 540.95,2658.13 545.7,2662.89 651.03,2662.89 661.26,2662.89 ccw(c661.26,2690.23) 688.61,2690.23 688.61,2707.42 cw(c701.72,2707.42) 714.84,2707.42 714.84,2636.7 ccw(c742.18,2636.7) 769.53,2636.7 769.53,2707.42 cw(c782.64,2707.42) 795.76,2707.42 795.76,2636.7 ccw(c823.1,2636.7) 850.45,2636.7 850.45,2649.77 cw(c863.56,2649.77) 863.56,2662.88 896.1,2662.89 983.24,2662.89 1046.68,2599.45 1046.68,2508.26 1105,2449.94 1105,2377.3 1105,2371.93 1135.08,2341.85 U1.42@1190,2341.85
VBUS: C16.1 C24.1 C25.1 D1.5 J1.1 pad.1@155,2138.36 RV1.2 U1.39 U2.3 | length 2852.6
  Top Layer w6: U1.39@1190,2400.91 1236.63,2400.91
  Top Layer w8: pad.1@155,2138.36 468.36,2138.36 485,2155 v1(485,2180)
  Top Layer w10: C24.1@125.91,2255 C24.1@130,2259.09 ; 130,2460.87 172.4,2503.27 172.4,2686.72 193.51,2707.83 ; C16.1@155,2034.09 C16.1@164.09,2025 ; J1.1@215,2707.83 193.51,2707.83 ; J1.1@226.3,2710.55 315.55,2710.55 390.86,2785.86 399.14,2785.86 400,2785 420,2785 455,2750 455,2682.69 467.69,2670 D1.5@504.21,2670 ; C25.1@245.08,2938.63 C25.1@221.45,2915 221.45,2823.32 182.76,2784.63 182.76,2718.59 193.51,2707.83 ; U2.3@318.07,2025 329.45,2013.62 U2.3@329.45,2011.22
  Top Layer w20: C24.1@125.91,2255 125.91,2167.44 pad.1@155,2138.36 C16.1@155,2034.09 ; C24.1@130,2259.09 RV1.2@130,2380 130,2460.87 ; C16.1@164.09,2025 U2.3@318.07,2025
  Bottom GND w8: v1(485,2180) 620,2315 1168.03,2315 1219.94,2366.91 1219.94,2380.17 v4(1248.43,2408.66)
WR: P1.9 pad.1@3530,1080 U1.79 | length 2787
  Top Layer w8: U1.79@1380.94,1678.46 1380.94,1596.88 1458.83,1519 1611,1519 1643,1487 1732.4,1487 1763.4,1518 1806.6,1518 1813,1511.6 1813,1485.97 1927.61,1371.37 1929.34,1371.37 1970.71,1330 1989.12,1330 1998.36,1339.24 2031.64,1339.24 2040.88,1330 2057.52,1330 2080.56,1341.24 2092.56,1353.24 2167.1,1353.24 2185.1,1371.24 2244.9,1371.24 2283.13,1333 2300.76,1330 2372,1330 2557,1145 2977.59,1145 3047.59,1075 3720,1075 P1.9@3770,1125
XIN: C5.1 pad.1@1260,2705 U1.36 Y1.1 | length 439.8
  Top Layer w8: U1.36@1262.83,2513.11 1262.83,2732.83 1275,2745 C5.1@1275,2830.94 1391.1,2830.94 Y1.1@1391.69,2831.54
XIN32: C3.1 pad.1@877.01,2278.15 U1.48 Y2.1 | length 410
  Top Layer w8: C3.1@805,2284.06 864.41,2284.06 919.25,2229.21 Y2.1@935,2229.21 940.47,2223.74 U1.48@1190,2223.74
XOUT: C6.1 pad.1@1342.01,2723.15 U1.35 Y1.3 | length 600
  Top Layer w8: U1.35@1282.52,2513.11 1282.52,2663.43 1415,2795.91 1424.22,2795.91 1435,2806.69 1435,2856.38 1445.78,2867.16 1450.06,2867.16 1454.75,2871.84 1454.75,2878.84 1474.37,2898.46 1596.06,2898.46 C6.1@1600,2894.53
XOUT32: C4.1 pad.1@897.01,2048.15 U1.49 Y2.2 | length 495.6
  Top Layer w8: C4.1@805,2015.47 865.47,2015.47 925,2075 925,2120.79 Y2.2@935,2130.79 1010.79,2130.79 1027,2147 1027,2156.6 1043.4,2173 1053,2173 1084.06,2204.06 U1.49@1190,2204.06
XUSB_N: D1.1 J1.2 | length 200.2
  Top Layer w6.23: J1.2@226.3,2684.96 230.9,2680.36 258.31,2680.36 259.39,2679.28 348.2,2679.28 350.37,2677.11 364.3,2677.11 369.05,2681.87 369.05,2687.24 376.73,2694.93 381.5,2694.93 393.98,2707.4 D1.1@405.79,2707.4
  Top Layer w10: J1.2@226.3,2684.96 J1.2@227.52,2686.18
XUSB_P: D1.3 J1.3 | length 198.4
  Top Layer w6.23: J1.3@226.3,2659.37 230.9,2663.97 258.31,2663.97 259.39,2665.05 342.31,2665.05 344.47,2662.89 364.3,2662.89 369.05,2658.13 369.05,2652.76 376.73,2645.07 381.5,2645.07 393.98,2632.6 D1.3@405.79,2632.6
pads on no net: J1.4 J9.5 J9.6 U1.1 U1.5 U1.6 U1.21 U1.22 U1.23 U1.24 U1.25 U1.26 U1.32 U1.37 U1.38 U1.40 U1.50 U1.51 U1.55 U1.59 U1.68 U1.71 U1.72 U1.76 U1.77 U1.83 U1.84 U1.89 U1.90 U1.95 U1.97 U1.102 U1.103 U1.107 U1.112 U1.113 U1.114 U1.115 U1.116 U1.117 U1.118 U1.119 U1.120 U1.121 U1.122 U1.123 U1.127 U1.128 U1.129 U1.131 U1.138 U1.142

## Polygon pours and split planes (outlines as drawn)
GND on Top Layer "GND_L01_P017" (solid, pour order 17): 725,585 965,585 965,195 960,190 80,190 80,1325 75,1330 175,1330 175,1120 245,1050 245,965 360,965 385,940
+3V3 on Top Layer "+3V3_L01_P018" (solid, remove dead copper, pour order 18): 295,1875 665,1875 745,1955 840,1955 840,1860 835,1855 832.91,1857.09 777.91,1857.09 780,1855 690,1765 685,1765 685,1710 645,1670 645,1590 665,1570 865,1570 865,1179.68 860.32,1175 285,1175 190,1270 190,1355 305,1355 435,1485 435,1670 360,1670 295,1735
NetC40_1 on Top Layer "NETC40_1_L01_P016" (solid, pour order 16): 780,993.51 780,825 745,790 745,600 895,600 895,993.51
+12 on Top Layer "+12_L01_P015" (solid, pour order 15): 415,925 415,455 445,455 590,310 710,310 710,585 640,655 640,740 570,740 525,785 525,925
GND on Top GND "GND POUR1" (solid, remove dead copper, pour order 1): 0,0 3915,0 3915,3280 0,3280
GND on Bottom GND "GND POUR2" (solid, remove dead copper, pour order 19): 0,0 3915,0 3915,3280 0,3280

## Silkscreen, mask and mechanical layers (free items; w line width, h text height)
Top Overlay:
  drawing of 60 lines, arcs and shapes, not listed
  text "+3V3" at 270,3060 h20
  text "IMU-GYRO" at 488,2948 h30
  text "SPEAKER" at 3263,2948 h30
  text "METAL SENSORS" at 2353,2938 h30
  text "SONAR SENSORS" at 3468,2122 h30 r270
  text "RESTURANT ROBOT" at 2434.34,1775 h100
  text "ERASE" at 1513,978 h30
  text "RESET" at 1003,908 h30
  text "LEFT MOTOR" at 2508.11,338 h30
  text "RIGHT MOTOR" at 1508,318 h30
  text "GND" at 590,80 h20
  text "+5" at 955,70 h20